# Altium PCB Key.PcbDoc
Units mil, origin at the board's own origin, x right, y up, seen from the top; angles counter-clockwise.
Board outline 1830 x 1320 mil, 2 copper layers (Top Layer, Bottom Layer); 18 components, 12 nets, 91 pads, 12 vias.
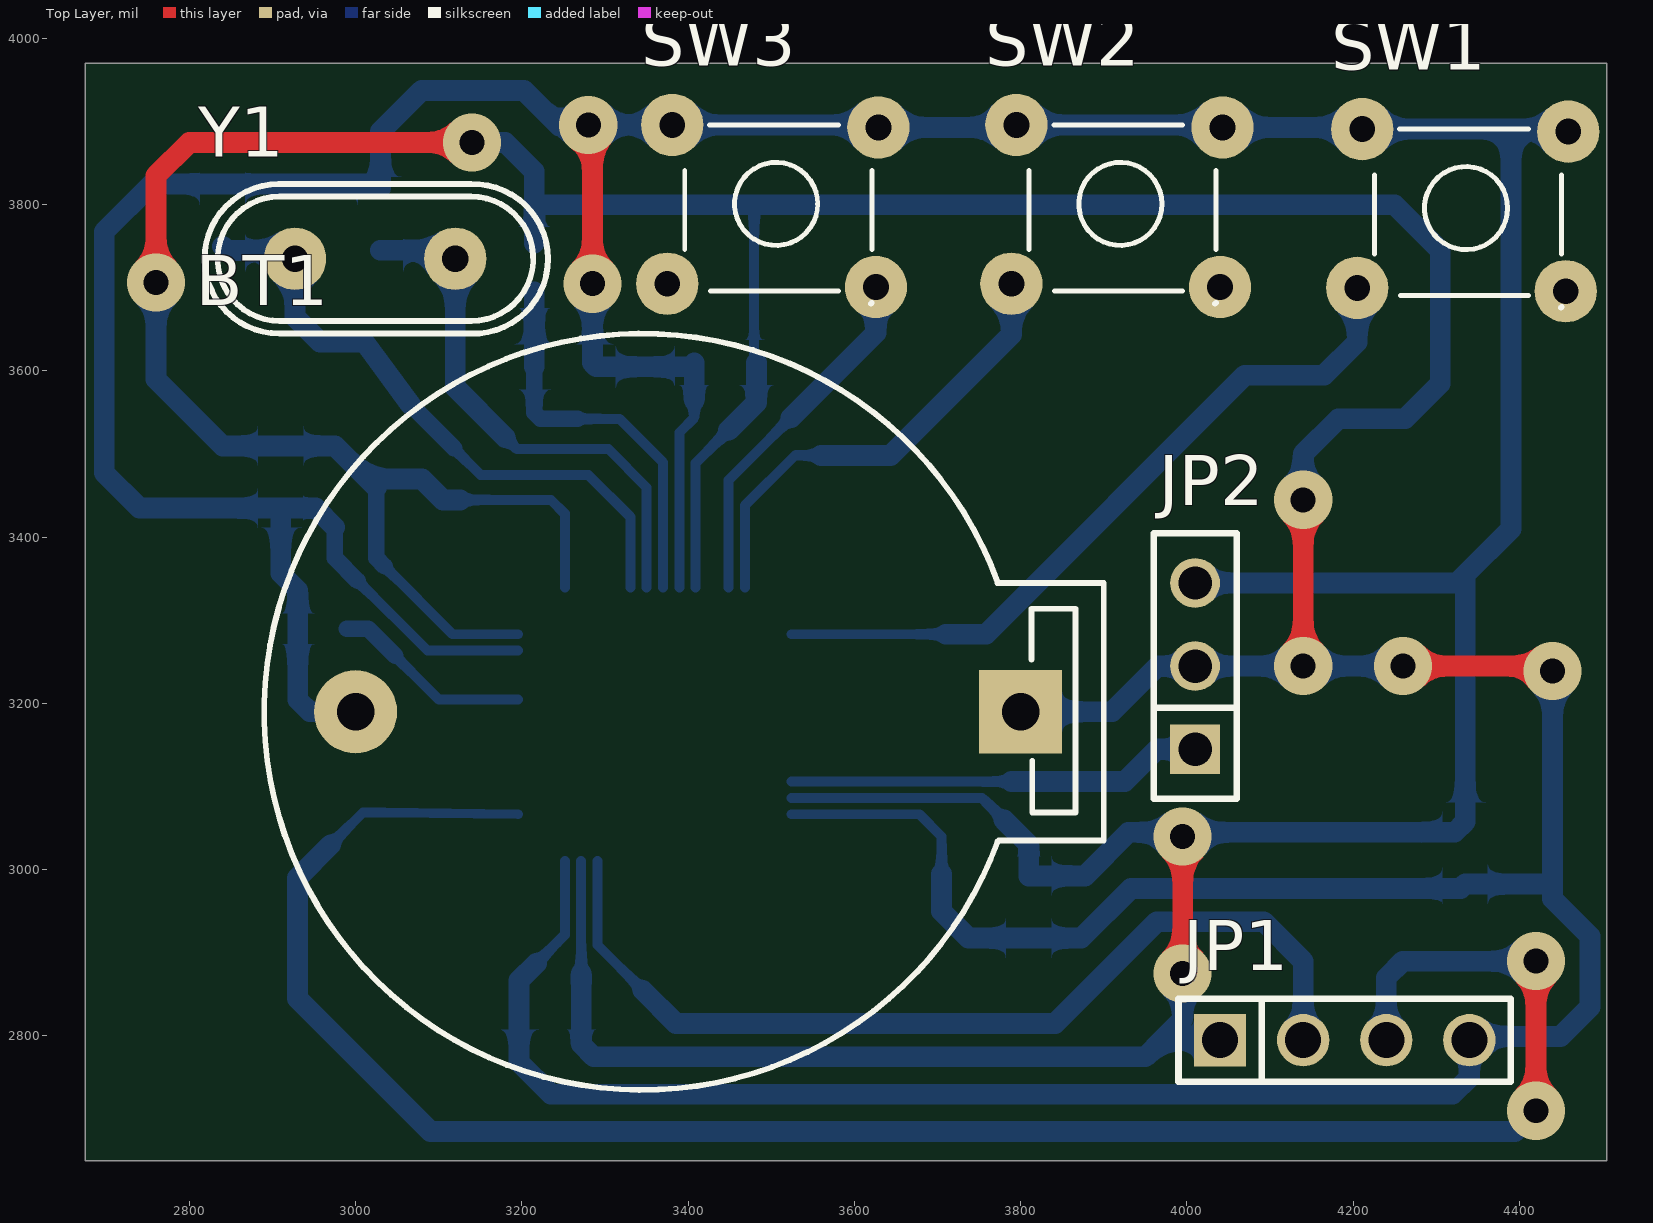
[diagram p0: Top Layer view]
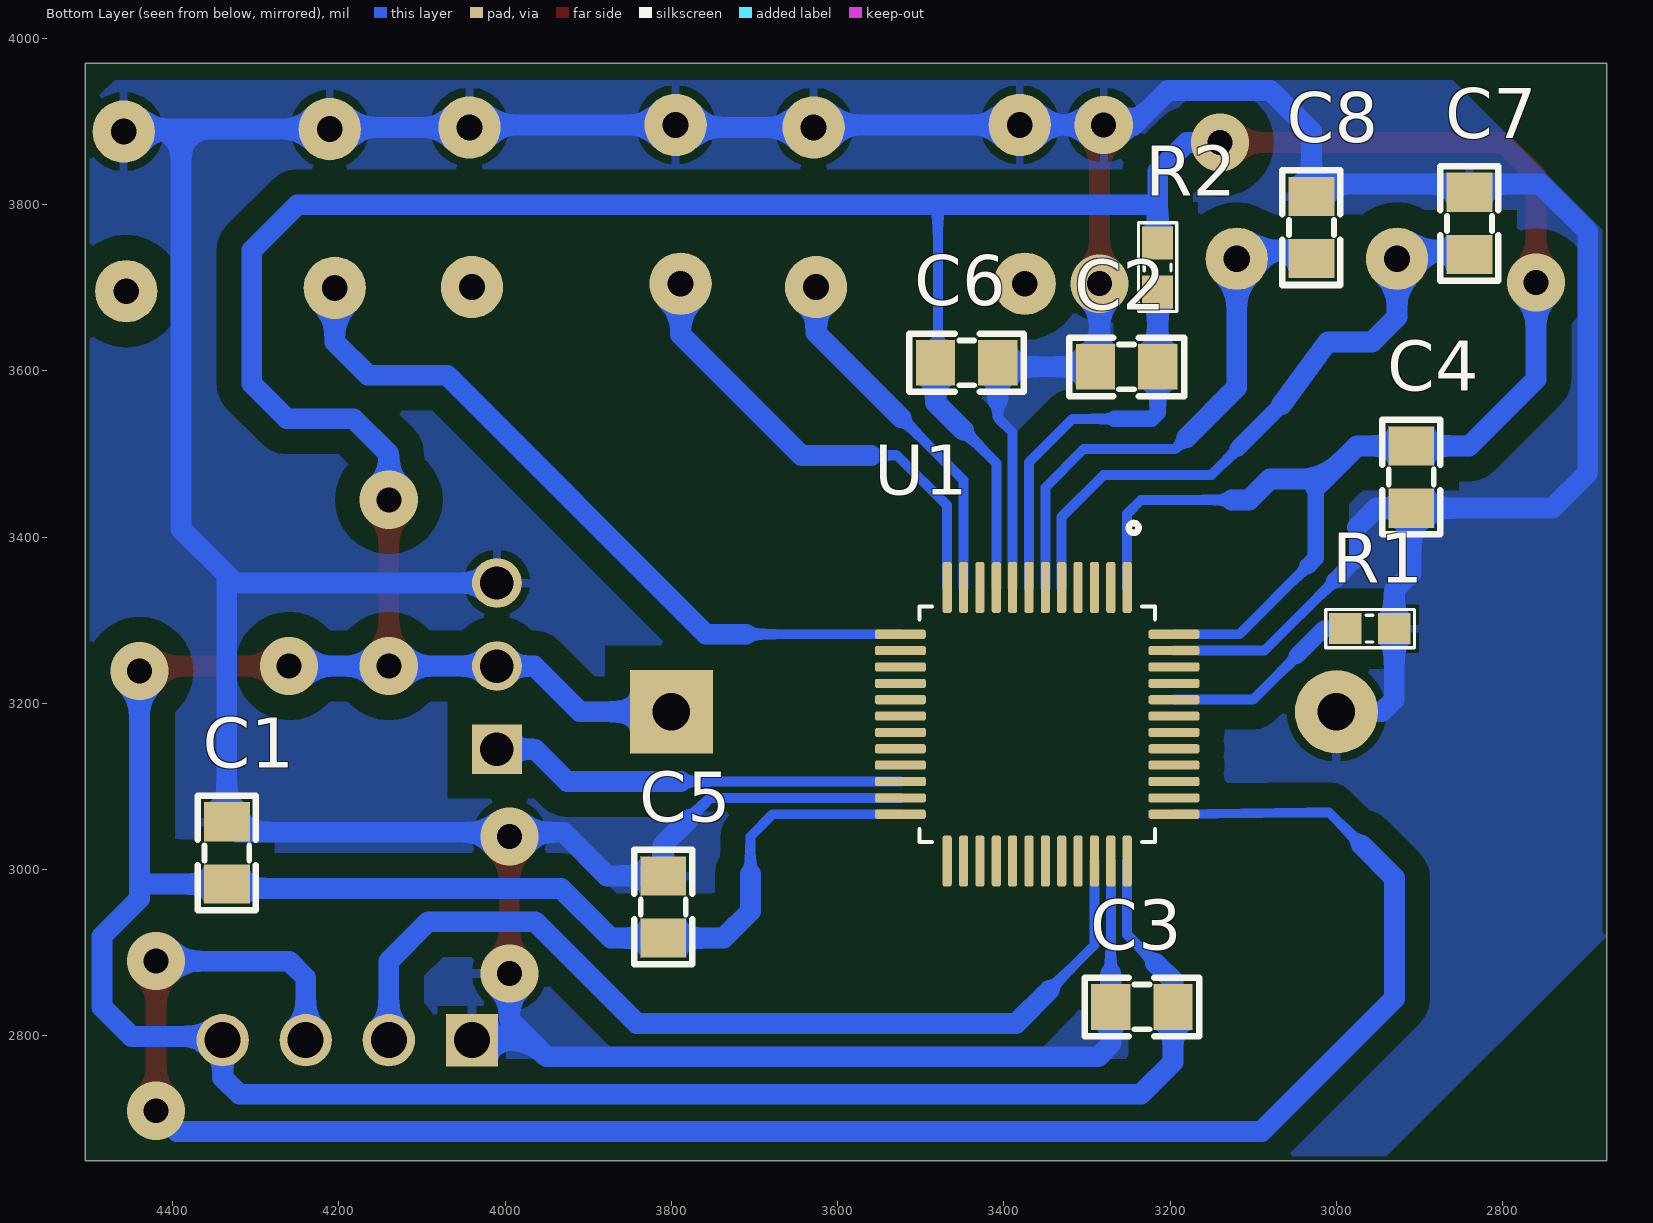
[diagram p1: Bottom Layer view, seen from below]
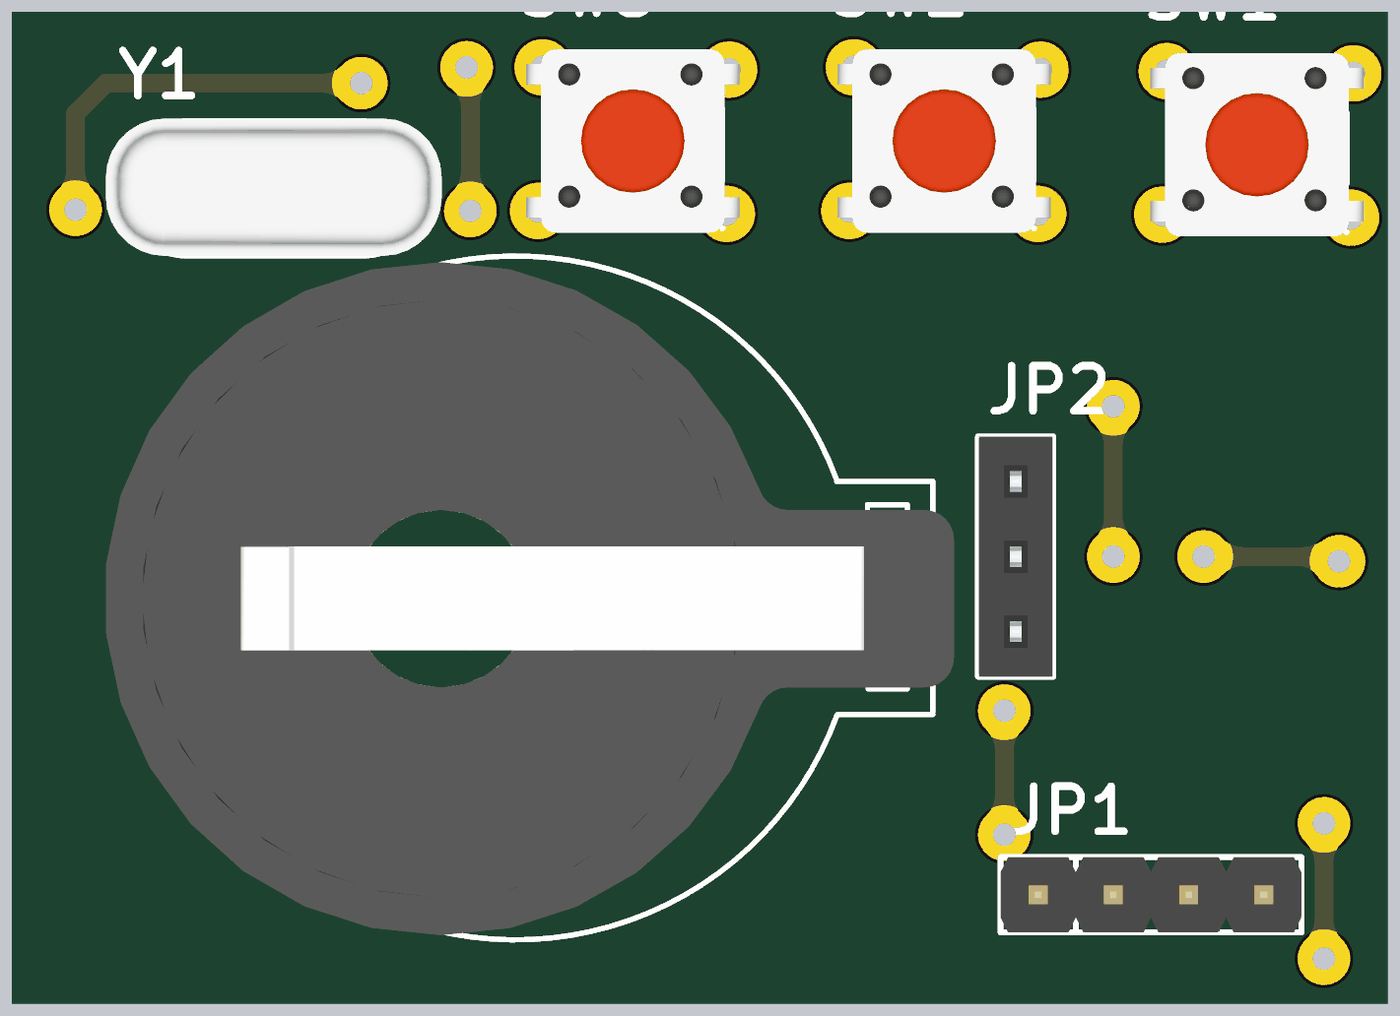
[diagram p2: 3D render of the assembled board from above, using the file's embedded part models]
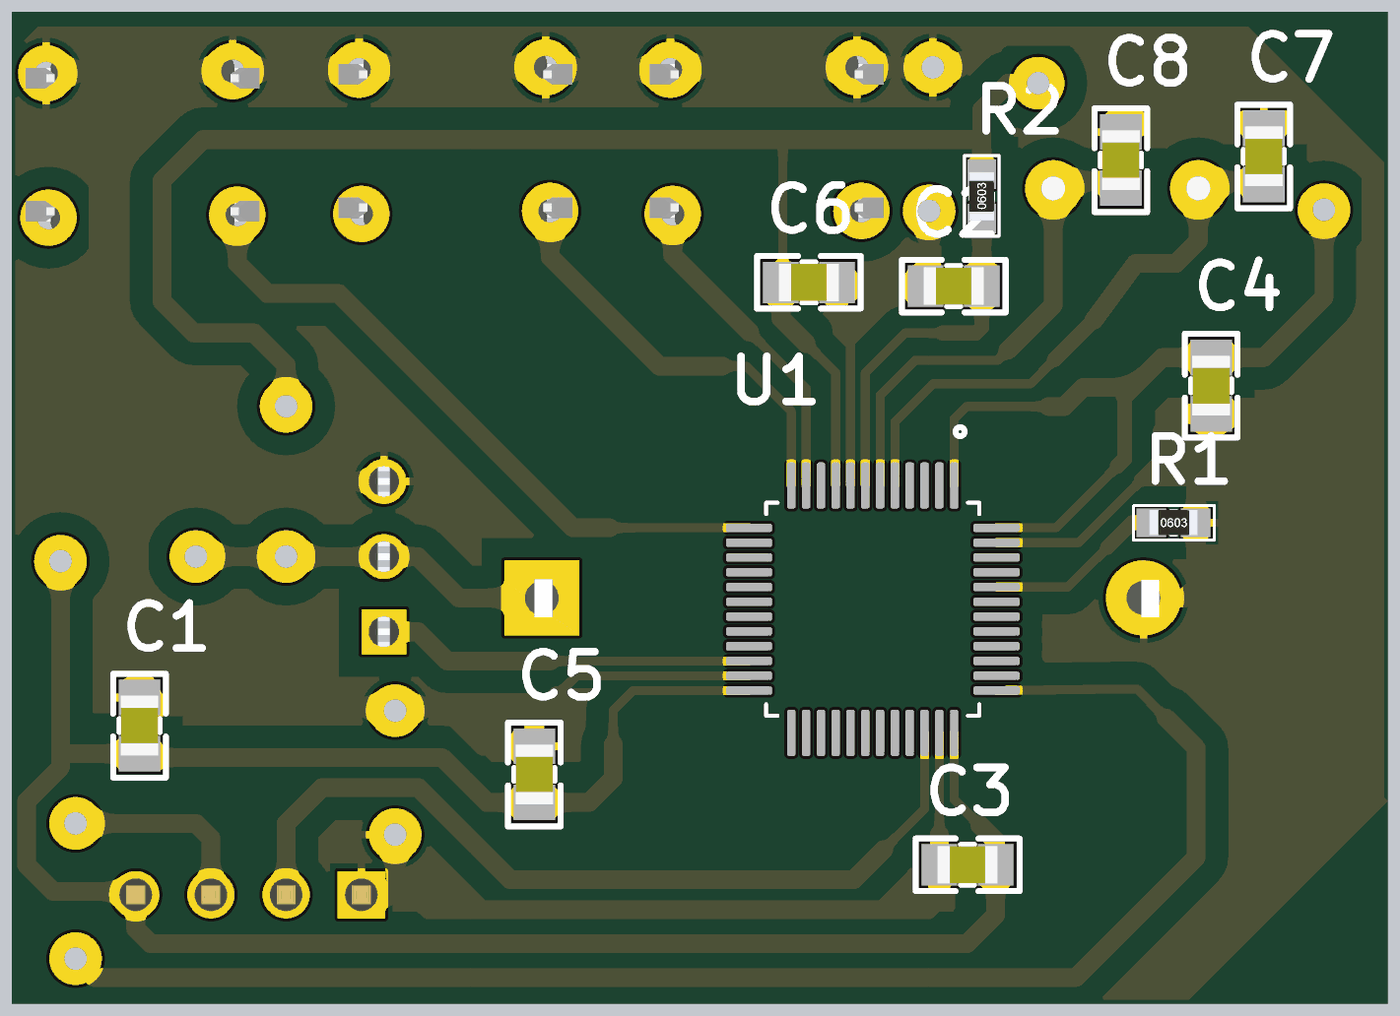
[diagram p3: 3D render of the assembled board from below, using the file's embedded part models]

## Layer stack, top to bottom
Top Solder: solder mask 0.4, Solder Resist, Dk 3.5
Top Layer: signal copper 1.4
Dielectric 1: dielectric 12.6, FR-4, Dk 4.8
Bottom Layer: signal copper 1.4
Bottom Solder: solder mask 0.4, Solder Resist, Dk 3.5

## Board outline
2675,2650 4505,2650 4505,3970 2675,3970

## Design rules (kind name [scope] priority, off if disabled: settings)
Clearance [All] p1: gap=30 ignorepadtopadclearanceinfootprint=FALSE
PolygonConnect [All] p1: connectstyle=Relief reliefconductorwidth=10 reliefentries=4 polygonreliefangle="90 Angle" airgapwidth=10
RoutingVias [All] p1: holewidth=30 width=70 viastyle="Through Hole" minholewidth=30 minwidth=70 maxholewidth=30 maxwidth=70
SolderMaskExpansion [All] p1: expansion=4
Width [All] p1: maxlimit=35 minlimit=12 preferedwidth=25
30 further rules are at their usual default settings.

## Classes and differential pairs
component class Key: C1 C2 C3 C4 C5 C6 C7 C8 JP1 JP2 R1 R2 SW1 SW2 SW3 U1 Y1

## Components (designator, comment, footprint, x,y, rotation, side; value= is the part's Value field where it differs from the comment)
BT1 "PIN 3V" PIN3V 3800,3190 r180 top
C1 "104" "tu 0805" 4335,3020 r90 bottom
C2 "104" "tu 0805" 3252.23,3604.87 r0 bottom
C3 "104" "tu 0805" 3233.84,2834.87 r0 bottom
C4 "104" "tu 0805" 2909.87,3472.57 r270 bottom
C5 "104" "tu 0805" 3810,2955 r90 bottom
C6 "104" "tu 0805" 3445,3610 r180 bottom
C7 "22pF" "tu 0805" 2840.13,3777.43 r90 bottom
C8 "22pF" "tu 0805" 3030.13,3772.43 r90 bottom
JP1 "JP 1x4 2.54" "JP 1x4 DT" 4040,2795 r0 top
JP2 "JP 1x3 2.54" "JP 1x3 CT" 4010,3145 r90 top
R1 "10k" "tro smd 0603" 2960,3290 r180 bottom
R2 "10k" "tro smd 0603" 3215,3724.53 r90 bottom
SW1 "SW" SW4 4211,3891 r0 top value="Button chip 4 pin"
SW2 "SW" SW4 3795,3896 r0 top value="Button chip 4 pin"
SW3 "SW" SW4 3381,3896 r0 top value="Button chip 4 pin"
U1 "STM32F103C8T6" QFP50P900X900X160-48N 3360,3175 r270 bottom
Y1 "16Mhz" "Thach Anh 2 chan cam" 3023.54,3735 r180 top value=4Mhz

## Footprints (in the part's own frame and the unit in brackets; to place one, negate y for a bottom-side part, rotate by r counter-clockwise, add the part's x,y. Pads: shape width x height; smd on the part's side, far side on the other; paste and mask are expansions set on the pad)
"JP 1x3 CT" [mm]
  rect 1.52x1.52 hole 1.02: 1(0,0)
  round 1.52 hole 1.02: 2(2.54,0) 3(5.08,0)
  silkscreen extent -1.52,-1.27 6.6,1.27, body extent -1.52,-1.25 6.6,1.25, height 8.51
"JP 1x4 DT" [mm] "4 pins, 1 row, straight, gold plating"
  rect 1.6x1.6 hole 1.1: 1(0,0)
  round 1.6 hole 1.1: 2(2.54,0) 3(5.08,0) 4(7.62,0)
  silkscreen extent -1.27,-1.27 8.89,1.27, body extent -1.27,-1.27 8.89,1.27, height 8.54
PIN3V [mil] "Socket PIN 3V"
  rect 100x100 hole 45: 1(0,0)
  round 100 hole 45: 2(800,0)
  silkscreen extent -100,-455 910,455, body extent -128,-447 1002,449, height 278
QFP50P900X900X160-48N [mm]
  rrect50% 1.56x0.28 smd: 1(-4.18,2.75) 2(-4.18,2.25) 3(-4.18,1.75) 4(-4.18,1.25) 5(-4.18,0.75) 6(-4.18,0.25) 7(-4.18,-0.25) 8(-4.18,-0.75) 9(-4.18,-1.25) 10(-4.18,-1.75) 11(-4.18,-2.25) 12(-4.18,-2.75) 25(4.18,-2.75) 26(4.18,-2.25) 27(4.18,-1.75) 28(4.18,-1.25) 29(4.18,-0.75) 30(4.18,-0.25) 31(4.18,0.25) 32(4.18,0.75) 33(4.18,1.25) 34(4.18,1.75) 35(4.18,2.25) 36(4.18,2.75)
  rrect50% 0.28x1.56 smd: 13(-2.75,-4.18) 14(-2.25,-4.18) 15(-1.75,-4.18) 16(-1.25,-4.18) 17(-0.75,-4.18) 18(-0.25,-4.18) 19(0.25,-4.18) 20(0.75,-4.18) 21(1.25,-4.18) 22(1.75,-4.18) 23(2.25,-4.18) 24(2.75,-4.18) 37(2.75,4.18) 38(2.25,4.18) 39(1.75,4.18) 40(1.25,4.18) 41(0.75,4.18) 42(0.25,4.18) 43(-0.25,4.18) 44(-0.75,4.18) 45(-1.25,4.18) 46(-1.75,4.18) 47(-2.25,4.18) 48(-2.75,4.18)
  silkscreen extent -6.15,-3.6 3.6,3.6
SW4 [mil] "SW button 4pin, 250 x250 mil"
  round 75 hole 31: 1(0,0) 2(245,-195) 3(248,-3) 4(-6,-191)
  silkscreen extent 15,-215 240,0, body extent -36,-220 276,24, height 276
"Thach Anh 2 chan cam" [mm]
  round 1.905 hole 0.8: 1(-2.45,0) 2(2.45,0)
  silkscreen extent -5.28,-2.29 5.21,2.29, body extent -5.68,-2.36 5.68,2.29, height 3.5
"tro smd 0603" [mm] "Chip Capacitor, 2-Leads, Body 1,60x0,80mm, IPC Medium Density"
  rect 1x0.95 smd mask+0.076: 1(-0.75,0) 2(0.75,0)
  silkscreen extent -1.35,-0.58 1.37,0.58, body extent -0.82,-0.42 0.82,0.43, height 0.44
"tu 0805" [mm] "Compoment SMD 80x50mil"
  rect 1.2x1.4 smd: 1(-0.946,-0.003) 2(0.954,-0.003)
  silkscreen extent -1.75,-0.89 1.75,0.89, body extent -1.01,-0.64 1.01,0.63, height 0.61

## Part data
BT1: "Battery 3VDC"
C1 C2 C3 C4 C5 C6: library part "Tu 0805 104 50V 10%", "Dán", Chung_Loai=Dán, Don_Vi=Con, Ma_Hang=MH004551, So_Chan=2, Ten_Linh_Kien="T? 0805 104-100nF 10% 50V"
C7 C8: library part "Tu 0805 22pF 50V 10%", "Dán", Chung_Loai=Dán, Don_Vi=Con, Ma_Hang=MH004560, So_Chan=2, Ten_Linh_Kien="T? 0805 22P 10% 50V"
JP1: library part "JP 1x4 2.54 Duc Thang", "C?m", Chung_Loai=C?m, Don_Vi=Con, Ma_Hang=MH000903, Ten_Linh_Kien="Jump Ðon Ð?c 2.54MM 1x40P Th?ng 11MM"
JP2: library part "JP 1x3 2.54 Cai Thang", "C?m", Chung_Loai=C?m, Don_Vi=Con, Ma_Hang=MH004006, Ten_Linh_Kien="Jump Ðon Cái 2.54MM 1x20P Th?ng"
R1 R2: library part "Tro 0603 5% 10k", "Dán", Chung_Loai=Dán, Don_Vi=Con, Ma_Hang=MH006316, So_Chan=2, Ten_Linh_Kien="Tr? 0603 5% 10k"
SW1 SW2 SW3: library part SW4, "Switch button 4 pin"
U1: "ARM® Cortex®-M3 STM32F1 Microcontroller IC 32-Bit 72MHz 64KB _64K x 8_ FLASH", Package="LQFP-48 STMicroelectronics", Availability=Unavailable, MF=STMicroelectronics, MP=STM32F103C8T6, Price=None, SnapEDA_Link=https://www.snapeda.com/parts/STM32F103C8T6/STMicroelectronics/view-part/52195/?ref=snap
Y1: library part "Thach Anh 2 chan Cam", "Crystal For all Crystal 2pin."

## Via types
v1: diameter 70, hole 30, Top Layer to Bottom Layer, 12 vias

## Nets (pads, with @x,y where several pads share a name; then routed paths per layer and width w, separated by ;. In a path a pad name is that pad's centre, name@x,y a point inside that pad or via, vN(x,y) a via of type N, cw(c..) or ccw(c..) an arc to the next point about the centre after c; other vN are vias at no path point)
GND: BT1.2 C1.2 C2.2 C3.2 C4.2 C5.2 C6.2 C7.2 C8.2 JP1.1 JP2.3 R1.2 SW1.1 SW1.3 SW2.1 SW2.3 SW3.1 SW3.3 U1.8 U1.23 U1.35 U1.47 | length 7148.6
  Top Layer w25: v1(3280,3896) 3285,3891 v1(3285,3705) ; v1(3995,2875) 3990,2880 3985,2880 3995,2890 v1(3995,3040)
  Bottom Layer w12: 3002.5,3347.5 3086.42,3263.58 U1.47 ; 3271.42,2875 U1.35 ; U1.8 3389.53,3525.85 3407.43,3543.75 3407.43,3565 ; U1.23 3753.58,3086.42 3780,3060
  Bottom Layer w20: 2975,3412.09 2975,3375 3002.5,3347.5
  Bottom Layer w25: 2975,3412.09 2952.09,3435 C4.2 ; BT1.2 2945,3190 2930.47,3204.53 R1.2 2930.47,3336.18 2910,3356.65 C4.2 ; 3271.42,2875 C3.2 3271.42,2790 3286.42,2775 3950,2775 3970,2795 ; v1(3280,3896) 3246.39,3896 3245.2,3894.8 3202.5,3937.5 3079.5,3937.5 3030,3888 3030,3820 3025,3825 2755,3825 2697.5,3767.5 2697.5,3477.5 2740,3435 C4.2 ; v1(3285,3705) 3285,3609.8 C2.2 3402.56,3605 C6.2 3407.43,3565 ; v1@3289.8,3896 SW3.1 3626,3896 SW3.3 3792,3893 SW2.1 4040,3896 SW2.3 4209,3893 SW1.1 4390,3891 ; 3780,3060 3809.87,3030.13 C5.2 3877.57,2992.57 3930,3045 4322.29,3045 C1.2 4334.87,3354.87 ; v1(3995,2875) 3995,2820 3970,2795 ; JP2.3 4325,3345 4334.87,3354.87 ; JP1.1 3970,2795 ; SW1.3 4456,3891 4390,3891 ; 4334.87,3354.87 4390,3410 4390,3891
NetR1_1: R1.1 U1.44 | length 241.3
  Bottom Layer w12: 3047.5,3257.5 3100.47,3204.53 U1.44
  Bottom Layer w20: R1.1 3015,3290 3047.5,3257.5
NetSW1_4: SW1.4 U1.13 | length 891.1
  Bottom Layer w12: U1.13 3710,3283.27
  Bottom Layer w25: 3710,3283.27 3758.27,3283.27 4070,3595 4165,3595 4205,3635 SW1.4
NetSW2_4: SW2.4 U1.12 | length 565.7
  Bottom Layer w12: U1.12 3468.27,3438.27 3528.48,3498.48 3560,3498.48
  Bottom Layer w25: 3560,3498.48 3643.48,3498.48 3789,3644 SW2.4
NetSW3_2: SW3.2 U1.11 | length 434.9
  Bottom Layer w12: U1.11 3448.58,3468.58 3523.75,3543.75
  Bottom Layer w25: 3523.75,3543.75 3626,3646 SW3.2
OSCIN: C7.1 U1.5 Y1.2 | length 754.1
  Bottom Layer w12: 3118.34,3507.13 3150.47,3475 3280,3475 3330.47,3424.53 U1.5
  Bottom Layer w20: 3066,3559.47 3118.34,3507.13
  Bottom Layer w25: C7.1@2840,3750.2 2845.2,3745 Y1.2@2927.09,3745 ; Y1.2 2927.09,3665 2957.09,3635 3010.47,3635 3066,3559.47
OSCOUT: C8.1 U1.6 Y1.1 | length 645.4
  Bottom Layer w12: 3180,3520 3194,3506 3304.16,3506 3350.16,3460 U1.6
  Bottom Layer w25: C8.1@3030,3745.2 3119.8,3745.2 Y1.1@3120,3745 ; Y1.1 3120,3580 3180,3520
RF_TX: JP2.1 U1.22 | length 501.5
  Bottom Layer w12: U1.22 3789,3106.1
  Bottom Layer w25: 3789,3106.1 3925.32,3106.1 3964.21,3145 JP2.1
RST: C2.1 R2.1 U1.7 | length 475.2
  Bottom Layer w12: 3267.5,3542.5 3317.5,3542.5 3369.84,3490.16 U1.7
  Bottom Layer w20: C2.1 3215,3550 3222.5,3542.5 3267.5,3542.5
  Bottom Layer w25: C2.1 R2.1
SWDCLK: JP1.3 U1.37 | length 2489.6
  Top Layer w25: v1(4420,2710) 4420,2870 4430,2880 v1(4420,2890)
  Bottom Layer w12: 2970,3030 3008.78,3068.78 3035,3068.78 U1.37
  Bottom Layer w25: 2970,3030 2930,2990 2930,2845 3090,2685 4395,2685 v1(4420,2710) 4430,2700 v1@4420,2690 ; JP1.3 4240,2870 4260,2890 v1(4420,2890)
SWDIO: JP1.2 U1.34 | length 1154.5
  Bottom Layer w12: U1.34 3291.1,2909.37 3345.47,2855
  Bottom Layer w25: 3345.47,2855 3385.47,2815 3841.61,2815 3964.11,2937.5 4092.5,2937.5 4140,2890 JP1.2
VCC3V3: BT1.1 C1.1 C3.1 C4.1 C5.1 C6.1 JP1.4 JP2.2 R2.2 U1.1 U1.9 U1.24 U1.36 U1.48 | length 7782.4
  Top Layer w25: v1(2760,3706.61) 2760,3835 2800,3875 v1(3140,3875) ; v1(4140,3245) v1(4140,3445) ; v1(4260,3245) 4433.9,3245 v1(4440,3238.9)
  Bottom Layer w12: 3035,3365 3116.73,3283.27 U1.48 ; 3126,3444.84 3235.16,3444.84 3251.73,3428.27 U1.1 ; 3217.5,2887.5 3251.73,2921.73 U1.36 ; U1.9 3409.21,3489.21 3448.58,3528.58 ; C6.1@3479.53,3609.87 3479.53,3800 ; U1.24 3678.27,3066.73 3705,3040 3705,2995
  Bottom Layer w20: 3025,3460 3025,3375 3035,3365
  Bottom Layer w25: v1(2760,3706.61) 2760,3590 2840.2,3509.8 C4.1 2975.2,3509.8 3015,3470 ; 3025,3460 3015,3470 ; 3126,3444.84 3105.16,3444.84 3080,3470 3015,3470 ; v1(3140,3875) 3180,3875 3215,3840 3215,3795 ; R2.2 3215,3795 ; 3217.5,2887.5 3196.61,2866.61 C3.1 3196.61,2768.39 3235,2730 4320,2730 4340,2750 JP1.4 4344.5,2799.5 4449.5,2799.5 4485,2835 4485,2920 4440,2965 4440,2985 ; 3448.58,3528.58 3482.23,3562.23 C6.1 ; 3705,2995 3705,2950 3737.23,2917.77 C5.1 3873.09,2917.77 3932.82,2977.5 4329.59,2977.5 C1.1 4437.77,2982.77 4440,2985 ; BT1.1 3910,3190 3965,3245 JP2.2 4016.1,3238.9 4022.2,3245 v1(4140,3245) v1(4260,3245) ; v1(4140,3445) 4140,3500 4182.5,3542.5 4262.5,3542.5 4305,3585 4305,3745 4250,3800 3479.53,3800 3220,3800 3215,3795 ; v1(4440,3238.9) 4440,2985
pads on no net: SW1.2 SW2.2 SW3.4 U1.2 U1.3 U1.4 U1.10 U1.14 U1.15 U1.16 U1.17 U1.18 U1.19 U1.20 U1.21 U1.25 U1.26 U1.27 U1.28 U1.29 U1.30 U1.31 U1.32 U1.33 U1.38 U1.39 U1.40 U1.41 U1.42 U1.43 U1.45 U1.46

## Polygon pours and split planes (outlines as drawn)
GND on Bottom Layer (solid, remove dead copper, pour order 6): 2695,3785 2860,3950 4470,3950 4500,3920 4500,2720 4440,2655 4395,2655 2940,2655 2675,2920 2680,2925 2680,3770 2685,3775 2700,3790